# EAGLE board board 4 (EAGLE 5.06)
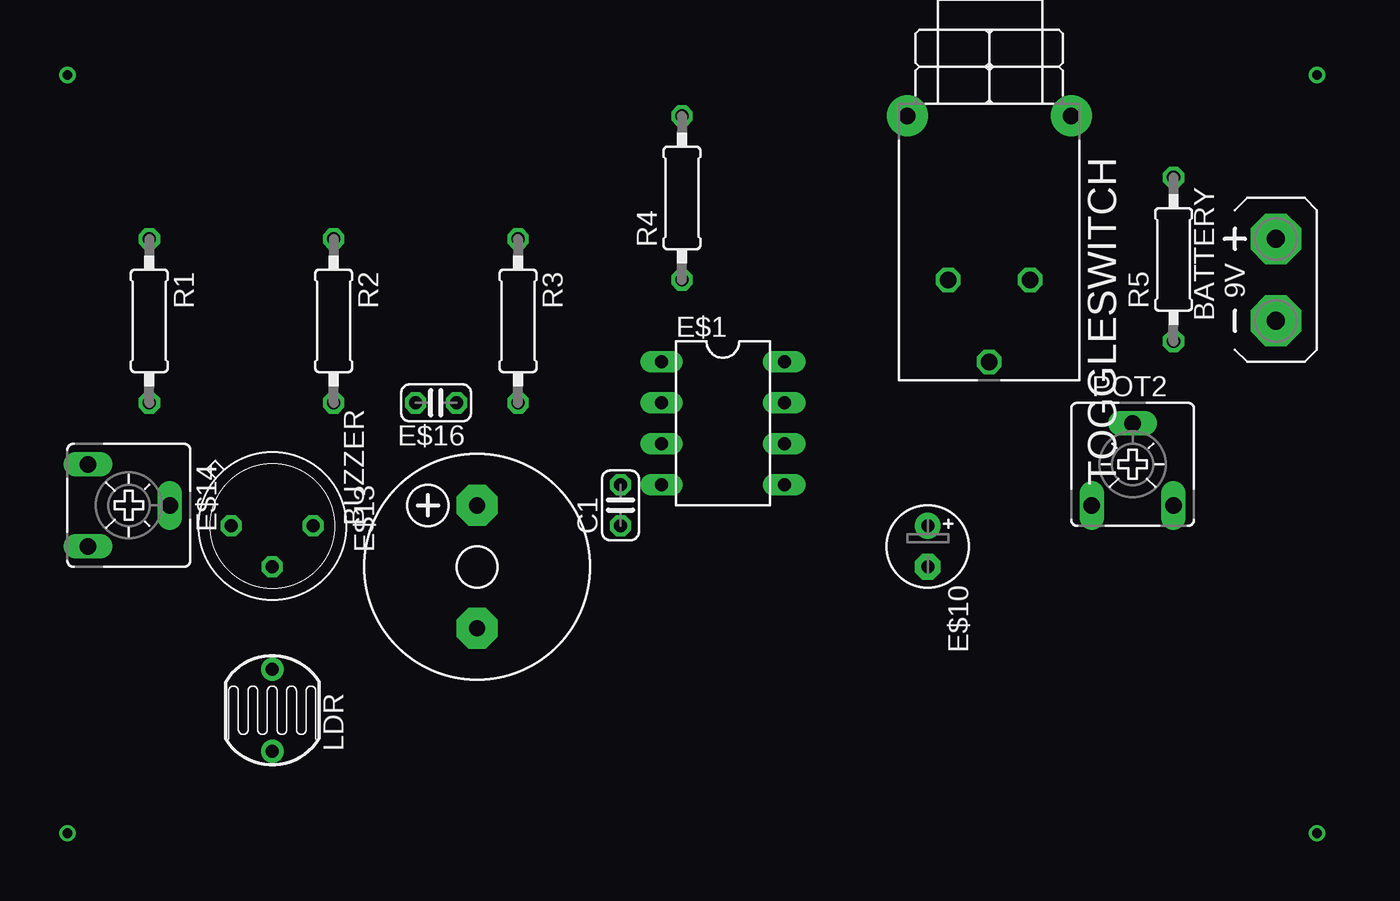
[diagram p0: board, top side]
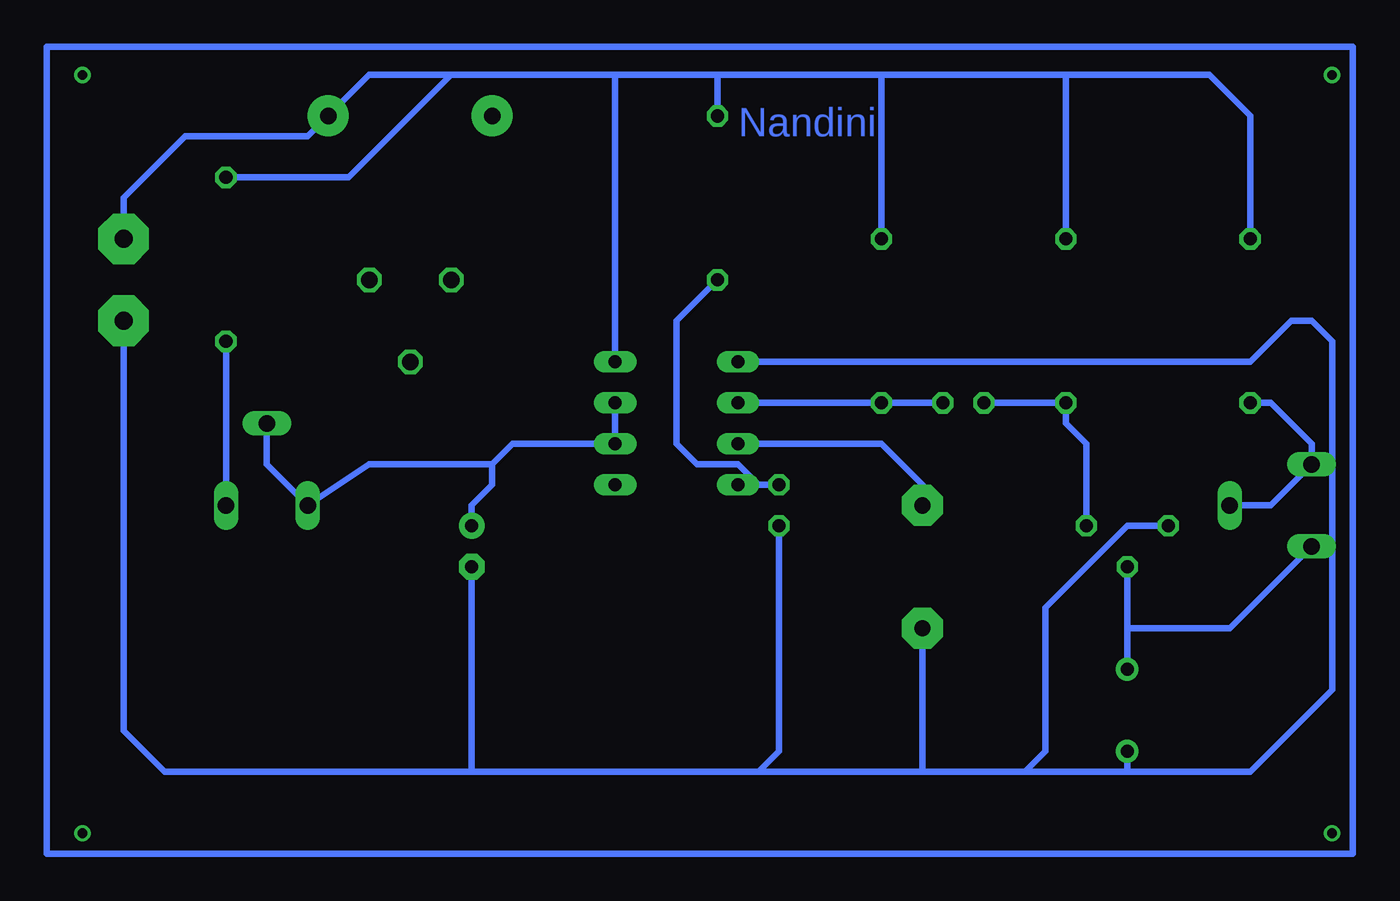
[diagram p1: board, bottom side, seen from below]

No outline drawn. Coordinates in mm, seen from the top.
Copper layers (1*16): Top 0.035mm / dielectric 1.5mm / Bottom 0.035mm
Design rules "default": minimum track width 10mil, minimum drill 24mil, track to track 8mil, track to pad 8mil, pad to pad 8mil, via to via 8mil, smd to smd 8mil, copper to edge 40mil, drill to drill 8mil, minimum pad ring 10mil, minimum via ring 8mil, stop-mask expansion 4mil, vias tented up to drill 0mil, thermal gap 10mil

## Footprints (pad centres in the part's own frame; a part is rotated, then mirrored left to right if it is on the bottom)
AB9V = drill 1.118 pad 3.15 octagon: + 0,2.54; - 0,-2.54
F/CM12P = drill 1.016 pad 2.54 octagon: + 3.81,0; - -3.81,0
C025-024X044 = drill 0.813 octagon: 1 -1.27,0; 2 1.27,0
DIL08 = drill 0.813 long: 1 -3.81,-3.81; 2 -1.27,-3.81; 3 1.27,-3.81; 4 3.81,-3.81; 5 3.81,3.81; 6 1.27,3.81; 7 -1.27,3.81; 8 -3.81,3.81
E2,5-5 = drill 0.813 pad 1.6 round: + -1.27,0 | drill 0.813 pad 1.6 octagon: - 1.27,0
TO5 = drill 0.813 octagon: 1 0,-2.54; 2 2.54,0; 3 0,2.54
CA6V = drill 1.016 long: A -2.54,-2.54; E 2.54,-2.54; S 0,2.54
VT800 = drill 0.8 pad 1.4 round: 1 -2.54,0; 2 2.54,0
0207/10 = drill 0.813 octagon: 1 -5.08,0; 2 5.08,0
316-917 = drill 1.016 octagon: 1 10.16,2.54; 2 15.24,0; 3 10.16,-2.54 | drill 1.016 pad 2.54 round: B 0,-5.08; B1 0,5.08

## Placement (x,y rotation side)
BATTERY  [AB9V]  76.2,35.56 0 top
BUZZER  [F/CM12P]  26.67,17.78 90 top
C1  0.01UF  [C025-024X044]  35.56,21.59 90 top
E$1  [DIL08]  41.91,26.67 270 top
E$10  [E2,5-5]  54.61,19.05 270 top
E$13  BC108  [TO5]  13.97,20.32 270 top
E$14  100K  [CA6V]  5.08,21.59 270 top
E$16  0.1UF  [C025-024X044]  24.13,27.94 180 top
LDR  [VT800]  13.97,8.89 90 top
POT2  [CA6V]  67.31,24.13 0 top
R1  10K  [0207/10]  6.35,33.02 270 top
R2  1M  [0207/10]  17.78,33.02 270 top
R3  1M  [0207/10]  29.21,33.02 270 top
R4  1M  [0207/10]  39.37,40.64 90 top
R5  [0207/10]  69.85,36.83 90 top
TOGGLESWITCH  [316-917]  58.42,45.72 270 top

## Library data of the parts
BATTERY = battery
BUZZER = buzzer
C1 E$10 E$16 R1-R5 = resistor
E$1 = ic-package
E$13 = transistor
E$14 POT2 = pot
LDR = photo-elements
TOGGLESWITCH = switch

## Nets
555: C1.2 E$1.4 R4.1
C2: BATTERY.- BUZZER.- C1.1 E$1.1 E$10.- E$13.1 LDR.1
POT1: E$14.A E$14.S R1.2
S$2: POT2.E R5.1
S$5: E$1.2 E$16.1 R3.2
S$6: E$13.3 E$16.2 R2.2
S$7: BUZZER.+ E$1.3
S$8: E$13.2 E$14.E LDR.2
S$12: E$1.6 E$1.7 E$10.+ POT2.A POT2.S
SWITCH: BATTERY.+ E$1.8 R1.1 R2.1 R3.1 R4.2 R5.2 TOGGLESWITCH.B1

## Tracks (layer width: path | path; a pad name or v marks a point on that pad's centre or on a via)
555
  Bottom 0.406: E$1.4 36.83,22.86 | 36.83,22.86 C1.2 | 36.83,22.86 38.1,24.13 40.64,24.13 41.91,25.4 41.91,33.02 R4.1
C2
  Bottom 0.406: BATTERY.- 76.2,7.62 73.66,5.08 54.61,5.08 | E$1.1 6.35,30.48 3.81,33.02 2.54,33.02 1.27,31.75 1.27,10.16 6.35,5.08 13.97,5.08 | E$13.1 13.97,20.32 19.05,15.24 19.05,6.35 20.32,5.08 | C1.1 35.56,6.35 36.83,5.08 | 54.61,5.08 E$10.- | 36.83,5.08 54.61,5.08 | 26.67,5.08 36.83,5.08 | 26.67,5.08 BUZZER.- | 20.32,5.08 26.67,5.08 | 13.97,5.08 20.32,5.08 | 13.97,5.08 LDR.1
POT1
  Bottom 0.406: E$14.S 5.08,21.59 E$14.A 2.54,25.4 5.08,27.94 R1.2
S$1
  Bottom 0.406: 0,0 80.95,0 80.95,50 0,50 0,0
S$2
  Bottom 0.406: POT2.E R5.1
S$3  (via drill 0.6)
  other vias: 1.27,1.27
S$4  (via drill 0.6)
  other vias: 78.74,1.27
S$5
  Bottom 0.406: E$1.2 R3.2 E$16.1
S$6
  Bottom 0.406: E$16.2 R2.2 17.78,26.67 16.51,25.4 E$13.3
S$7
  Bottom 0.406: E$1.3 29.21,25.4 26.67,22.86 BUZZER.+
S$8
  Bottom 0.406: E$13.2 13.97,13.97 | 13.97,13.97 LDR.2 | 13.97,13.97 7.62,13.97 E$14.E
S$9  (via drill 0.6)
  other vias: 78.74,48.26
S$10  (via drill 0.6)
  other vias: 1.27,48.26
S$12
  Bottom 0.406: POT2.S 67.31,24.13 POT2.A 60.96,24.13 53.34,24.13 | E$10.+ 54.61,21.59 53.34,22.86 53.34,24.13 | 53.34,24.13 52.07,25.4 E$1.6 E$1.7
SWITCH
  Bottom 0.406: BATTERY.+ 76.2,40.64 72.39,44.45 64.77,44.45 TOGGLESWITCH.B1 60.96,48.26 55.88,48.26 | 17.78,48.26 8.89,48.26 6.35,45.72 R1.1 | 17.78,48.26 29.21,48.26 | 29.21,48.26 39.37,48.26 | 39.37,48.26 45.72,48.26 | 45.72,48.26 55.88,48.26 | 29.21,48.26 R3.1 | 17.78,48.26 R2.1 | 39.37,48.26 R4.2 | R5.2 62.23,41.91 55.88,48.26 | 45.72,48.26 E$1.8

## Text on the board
Bottom: Nandini